# Altium PCB PCB2.PcbDoc
Units mm, origin at the board's own origin, x right, y up, seen from the top; angles counter-clockwise.
Board outline 100 x 55 mm, 2 copper layers (Top Layer, Bottom Layer); 46 components, 49 nets, 174 pads, 71 vias.
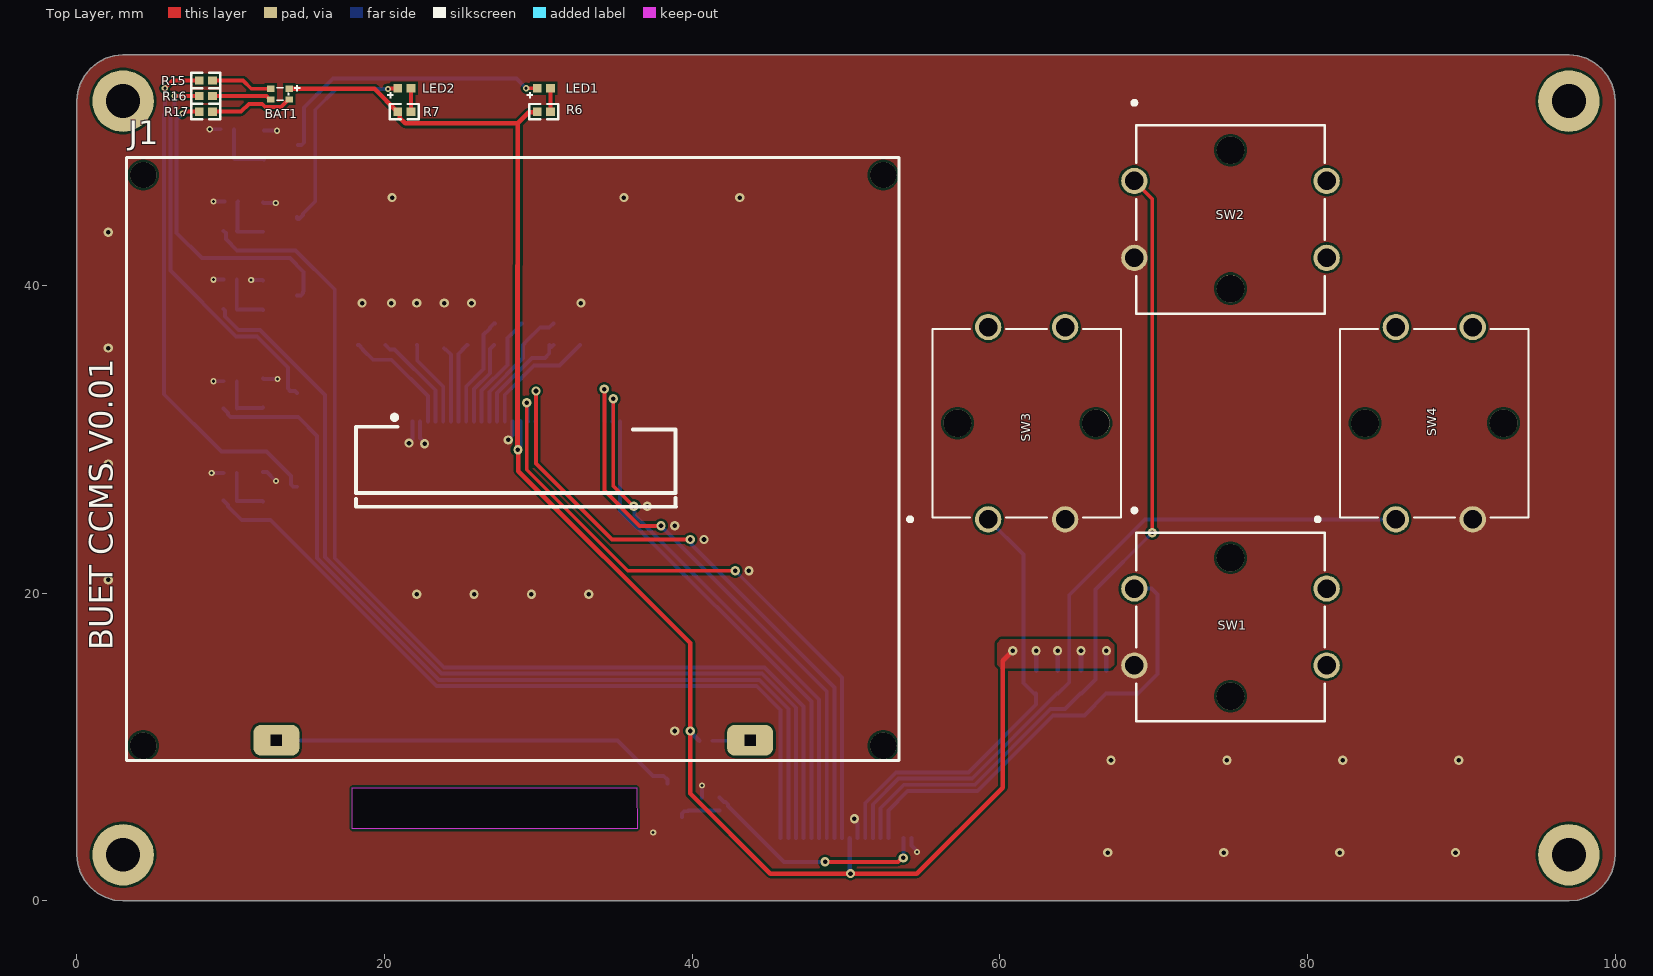
[diagram p0: Top Layer view]
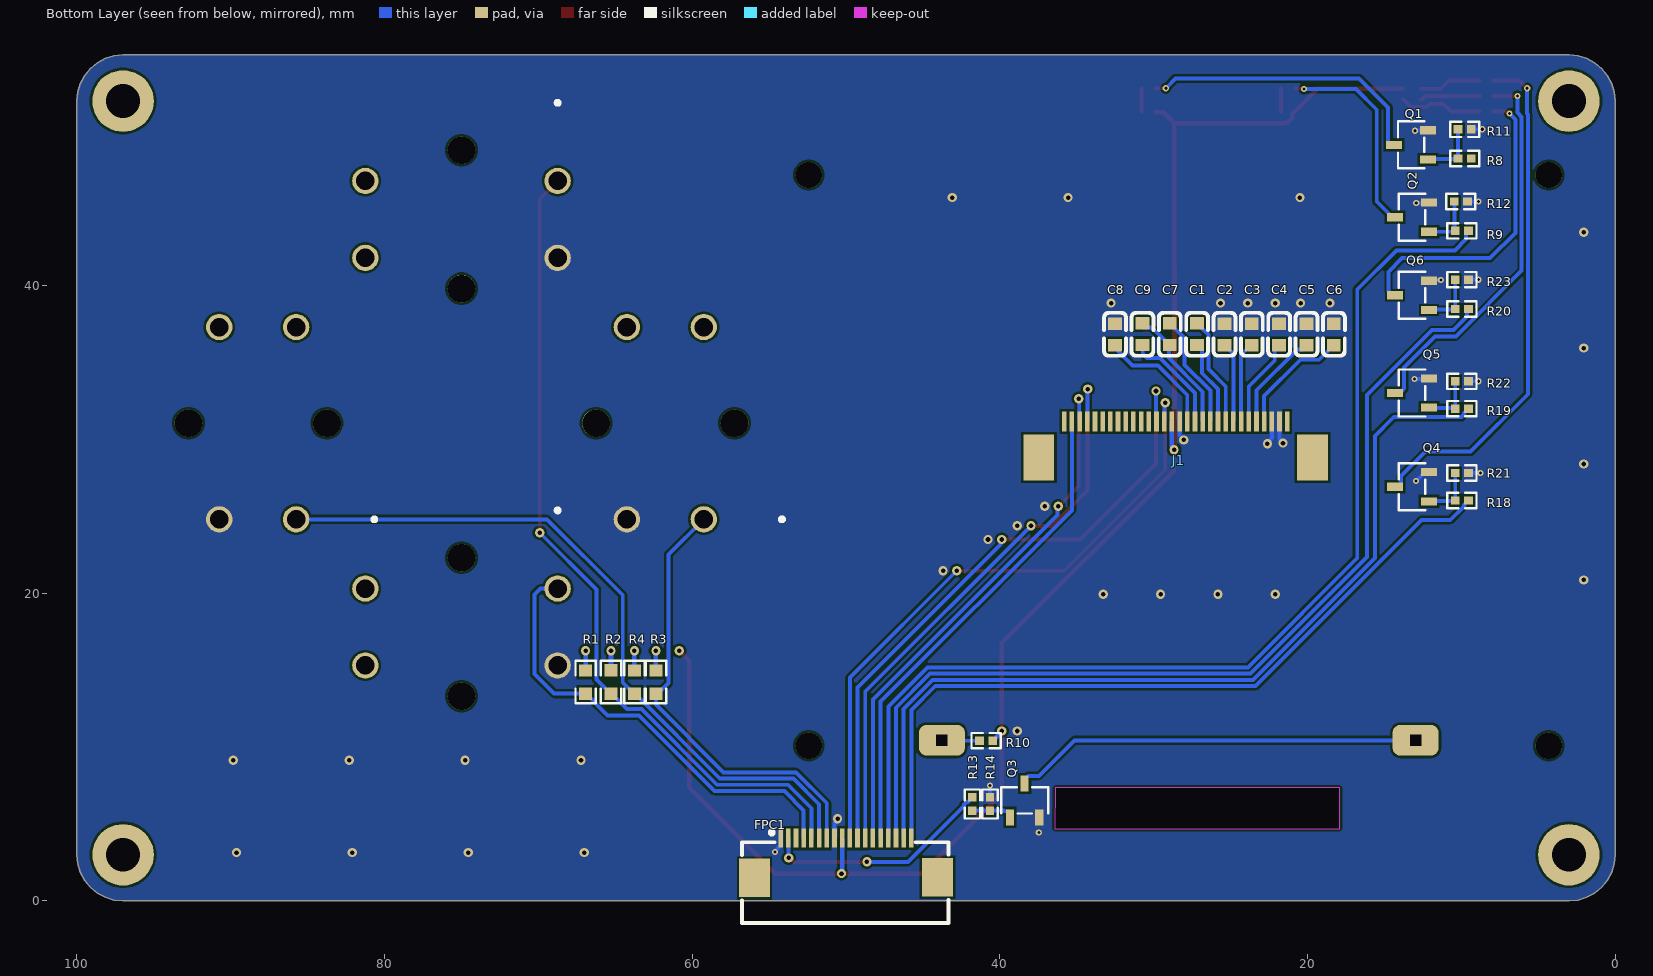
[diagram p1: Bottom Layer view, seen from below]
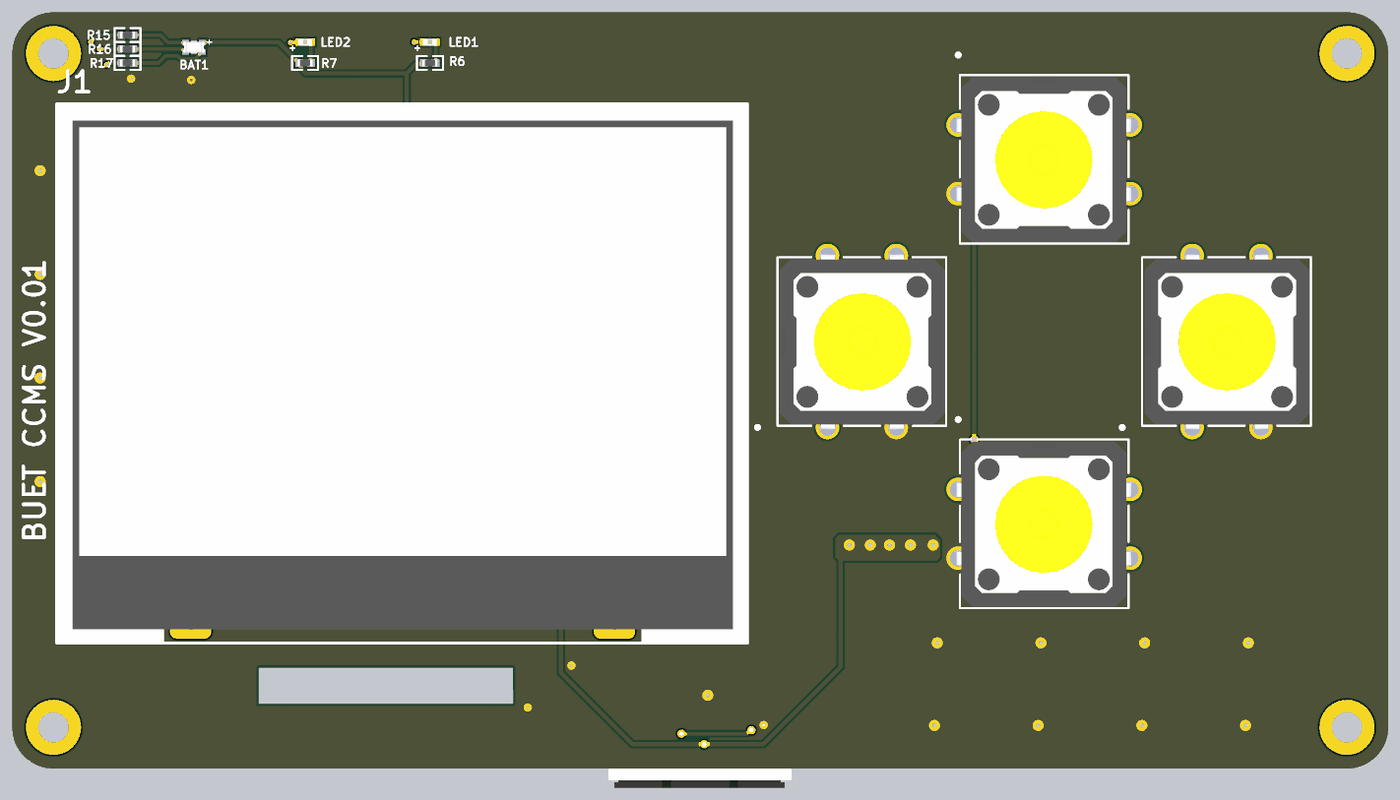
[diagram p2: 3D render of the assembled board from above, using the file's embedded part models]
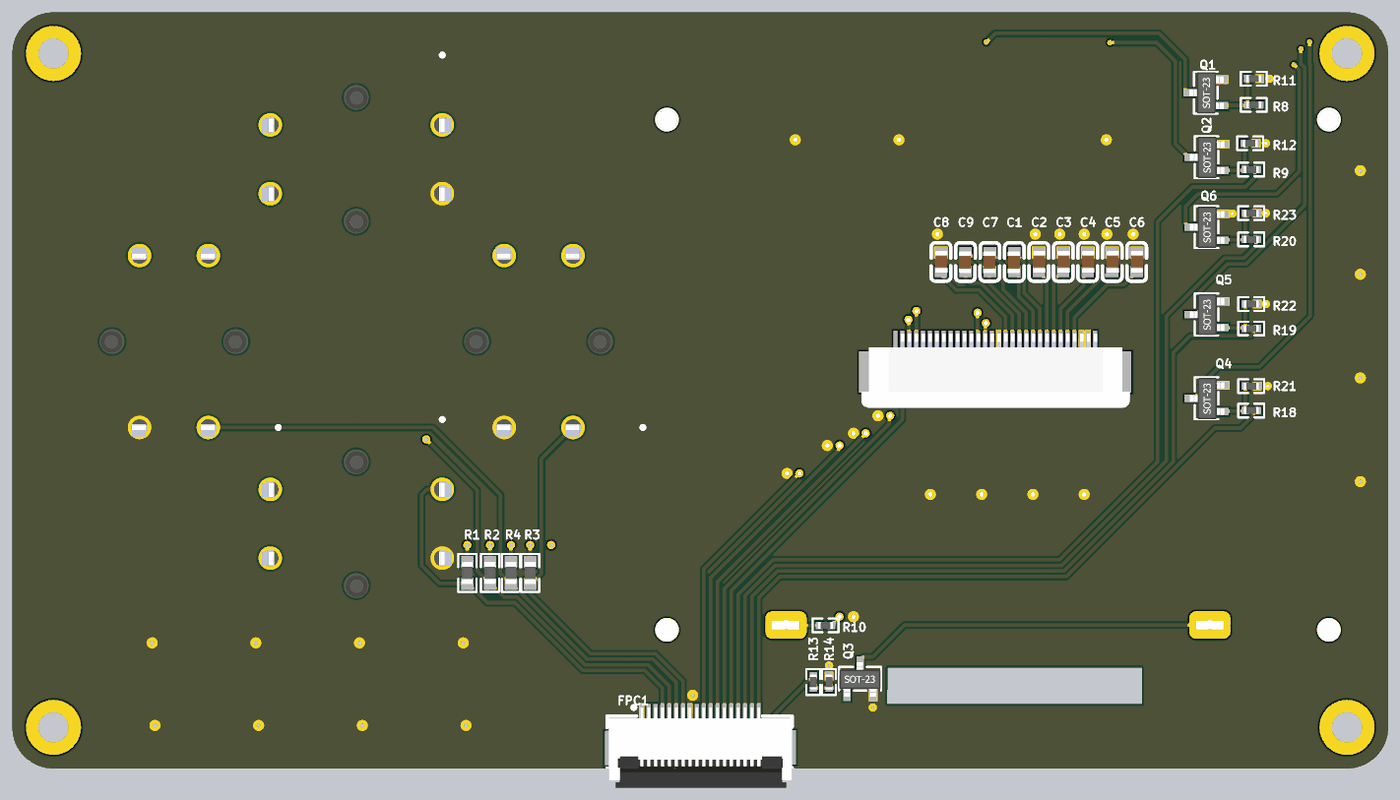
[diagram p3: 3D render of the assembled board from below, using the file's embedded part models]

## Layer stack, top to bottom
Top Solder: solder mask 0.0102, Solder Resist, Dk 3.5
Top Layer: signal copper 0.0356
Dielectric 1: dielectric 0.32, FR-4, Dk 4.8
Bottom Layer: signal copper 0.0356
Bottom Solder: solder mask 0.0102, Solder Resist, Dk 3.5

## Board outline
100,52 99.942,52.585 99.772,53.148 99.494,53.667 99.121,54.121 98.667,54.494 98.148,54.772 97.585,54.942 97,55 3,55 2.415,54.942 1.852,54.772 1.333,54.494 0.879,54.121 0.506,53.667 0.228,53.148 0.058,52.585 0,52 0,3 0.058,2.415 0.228,1.852 0.506,1.333 0.879,0.879 1.333,0.506 1.852,0.228 2.415,0.058 3,0 97,0 97.585,0.058 98.148,0.228 98.667,0.506 99.121,0.879 99.494,1.333 99.772,1.852 99.942,2.415 100,3
cut-out: 36.419,4.699 17.907,4.699 17.907,7.342 36.388,7.342

## Design rules (kind name [scope] priority, off if disabled: settings)
Clearance [All] p1: gap=0.15 ignorepadtopadclearanceinfootprint=TRUE except(0: Arc-Hole Track-Hole SMDPad-Hole THPad-Hole Via-Hole Fill-Hole Poly-Hole Region-Hole Text-Hole)
PolygonConnect [All] p1: connectstyle=Direct reliefconductorwidth=0.254 reliefentries=4 polygonreliefangle="90 Angle" airgapwidth=0.254
RoutingVias [All] p1: holewidth=0.711 width=1.27 viastyle="Through Hole" minholewidth=0.711 minwidth=1.27 maxholewidth=0.711 maxwidth=1.27
SolderMaskExpansion [All] p1: expansion=0.102 istentingtop=FALSE
Width Width_1 [InNet('+3.3V')] p1: maxlimit=0.3 minlimit=0.3 preferedwidth=0.3
Width [All] p2: maxlimit=0.254 minlimit=0.254 preferedwidth=0.254
30 further rules are at their usual default settings.

## Classes and differential pairs
net class 3.3: +3.3V

## Components (designator, comment, footprint, x,y, rotation, side; value= is the part's Value field where it differs from the comment)
BAT1 "XL-1608RGBC" "LED RGB 0603" 13.208,52.451 r180 top
C1 "1uF" C0603 27.173,36.845 r90 bottom value=50V,1uF
C2 "1uF" C0603 25.4,36.83 r270 bottom value=50V,1uF
C3 "1uF" C0603 23.622,36.83 r270 bottom value=50V,1uF
C4 "1uF" C0603 21.844,36.83 r270 bottom value=50V,1uF
C5 "1uF" C0603 20.066,36.83 r270 bottom value=50V,1uF
C6 "1uF" C0603 18.288,36.83 r270 bottom value=50V,1uF
C7 "1uF" C0603 28.951,36.845 r90 bottom value=50V,1uF
C8 "1uF" C0603 32.512,36.83 r270 bottom value=50V,1uF
C9 "1uF" C0603 30.729,36.845 r90 bottom value=50V,1uF
FPC1 "FPC-05F-18PH20" FPC-SMD_18P-P0.50_horizontal 50,2.794 r180 bottom
J1 "COG display" COG 28.368,28.641 r0 top
LED1 "TJ-S1005CL4T5ALC6B-A5" "LED 0402" 30.353,52.832 r0 top value=Blue,20mA
LED2 "TJ-S1005CL4T5ALC6B-A5" "LED 0402" 21.284,52.832 r0 top value=Blue,20mA
Q1 "MMBT2222ALT1G" SOT-23 13.26,49.149 r180 bottom
Q2 "MMBT2222ALT1G" SOT-23 13.208,44.45 r180 bottom
Q3 "MMBT2222ALT1G" SOT-23 38.387,6.538 r270 bottom
Q4 "MMBT2222ALT1G" SOT-23 13.208,26.924 r180 bottom
Q5 "MMBT2222ALT1G" SOT-23 13.208,33.02 r180 bottom
Q6 "MMBT2222ALT1G" SOT-23 13.208,39.37 r180 bottom
R1 "0603WAF100JT5E" R0603 66.929,14.224 r270 bottom value=10kΩ,75V
R2 "0603WAF100JT5E" R0603 65.278,14.233 r270 bottom value=10kΩ,75V
R3 "0603WAF100JT5E" R0603 62.357,14.224 r270 bottom value=10kΩ,75V
R4 "0603WAF100JT5E" R0603 63.754,14.224 r270 bottom value=10kΩ,75V
R6 "1K" R0402 30.353,51.308 r0 top value=1kΩ,50V,5%
R7 "1K" R0402 21.284,51.308 r0 top value=1kΩ,50V,5%
R8 "1K" R0402 9.779,48.26 r0 bottom value=1kΩ,50V,5%
R9 "1K" R0402 9.958,43.561 r0 bottom value=1kΩ,50V,5%
R10 "1K" R0402 40.894,10.414 r0 bottom value=1kΩ,50V,5%
R11 "1kΩ" R0402 9.779,50.165 r0 bottom value=10kΩ,75V
R12 "1kΩ" R0402 10.033,45.466 r0 bottom value=10kΩ,75V
R13 "1K" R0402 41.783,6.298 r270 bottom value=1kΩ,50V,5%
R14 "1kΩ" R0402 40.64,6.298 r270 bottom value=10kΩ,75V
R15 "2.2KΩ" R0402 8.382,53.34 r180 top value=2.2kΩ,50V,1%
R16 "2.2KΩ" R0402 8.382,52.324 r180 top value=2.2kΩ,50V,1%
R17 "2.2KΩ" R0402 8.382,51.308 r180 top value=2.2kΩ,50V,1%
R18 "1K" R0402 9.958,26.035 r0 bottom value=1kΩ,50V,5%
R19 "1K" R0402 9.958,32.004 r0 bottom value=1kΩ,50V,5%
R20 "1K" R0402 9.958,38.481 r0 bottom value=1kΩ,50V,5%
R21 "1kΩ" R0402 9.958,27.813 r0 bottom value=10kΩ,75V
R22 "1kΩ" R0402 9.958,33.782 r0 bottom value=10kΩ,75V
R23 "1kΩ" R0402 9.958,40.386 r0 bottom value=10kΩ,75V
SW1 "B3F-4055" SW_B3F-4050_OMR 74.996,17.806 r0 top locked
SW2 "B3F-4055" SW_B3F-4050_OMR 74.996,44.306 r0 top
SW3 "B3F-4055" SW_B3F-4050_OMR 61.746,31.056 r90 top locked
SW4 "B3F-4055" SW_B3F-4050_OMR 88.246,31.056 r90 top locked

## Footprints (in the part's own frame and the unit in brackets; to place one, negate y for a bottom-side part, rotate by r counter-clockwise, add the part's x,y. Pads: shape width x height; smd on the part's side, far side on the other; paste and mask are expansions set on the pad)
C0603 [mm]
  rect 0.8x0.9 smd paste+0 mask+0.051: 1(-0.7,0) 2(0.7,0)
  silkscreen extent -1.41,-0.71 1.39,0.72, body extent -0.83,-0.42 0.77,0.48, height 0.8
COG [mm]
  rect 2x3 smd far side: 0(-8.703,0.188) 0(9.097,0.188)
  round 1.7 hole 1.7: 1(-24.05,-18.55) 1(-24.05,18.55) 1(24.05,-18.55) 1(24.05,18.55)
  rect 0.3x1.3 smd far side: 1(7.447,2.538) 2(6.947,2.538) 3(6.447,2.538) 4(5.947,2.538) 5(5.447,2.538) 6(4.947,2.538) 7(4.447,2.538) 8(3.947,2.538) 9(3.447,2.538) 10(2.947,2.538) 11(2.447,2.538) 12(1.947,2.538) 13(1.447,2.538) 14(0.947,2.538) 15(0.447,2.538) 16(-0.053,2.538) 17(-0.553,2.538) 18(-1.053,2.538) 19(-1.553,2.538) 20(-2.053,2.538) 21(-2.553,2.538) 22(-3.053,2.538) 23(-3.553,2.538) 24(-4.053,2.538) 25(-4.553,2.538) 26(-5.053,2.538) 27(-5.553,2.538) 28(-6.053,2.538) 29(-6.553,2.538) 30(-7.053,2.538)
  rrect50% 3x2 hole 0.7 square: A(15.4,-18.2) K(-15.4,-18.2)
  silkscreen extent -25.14,-19.51 25.06,19.69, body extent -25.09,-19.62 25.11,19.58, height 4
FPC-SMD_18P-P0.50_horizontal [mm]
  rect 0.3x1.25 smd paste+0 mask+0.05: 1(-4.25,1.288) 2(-3.75,1.288) 3(-3.25,1.288) 4(-2.75,1.288) 5(-2.25,1.288) 6(-1.75,1.288) 7(-1.25,1.288) 8(-0.75,1.288) 9(-0.25,1.288) 10(0.25,1.288) 11(0.75,1.288) 12(1.25,1.288) 13(1.75,1.287) 14(2.25,1.287) 15(2.75,1.287) 16(3.25,1.287) 17(3.75,1.287) 18(4.25,1.287)
  rect 2x2.5 smd paste+0 mask+0.05: 19(-5.94,-1.288) 20(5.94,-1.252)
  silkscreen extent -6.77,-4.22 6.67,1.78, body extent -6.64,-4.19 6.66,1.66, height 2.11
"LED 0402" [mm]
  rect 0.566x0.54 smd paste-100 mask+0.051: 1(-0.433,0) 2(0.433,0)
  silkscreen extent -1.11,-0.65 -0.71,-0.25, body extent -0.5,-0.26 0.5,0.24, height 0.35
"LED RGB 0603" [mm]
  rect 0.5x0.4 smd paste+0 mask+0.051: 1(-0.6,0.35) 2(0.6,0.35) 3(-0.6,-0.35) 4(0.6,-0.35)
  silkscreen extent -1.31,-0.59 0.2,0.4, body extent -0.8,-0.4 0.8,0.4, height 0.55
R0402 [mm]
  rect 0.566x0.54 smd paste-100 mask+0.051: 1(-0.433,0) 2(0.433,0)
  silkscreen extent -0.94,-0.5 0.94,0.5, body extent -0.55,-0.25 0.55,0.25, height 0.32
R0603 [mm]
  rect 0.806x0.864 smd paste-100 mask+0.051: 1(-0.753,0) 2(0.753,0)
  silkscreen extent -1.39,-0.66 1.39,0.66, body extent -0.8,-0.4 0.8,0.4, height 0.45
SOT-23 [mm]
  rect 1.037x0.532 smd paste+0 mask+0.051: 1(1.101,-0.95) 2(1.101,0.95) 3(-1.101,0)
  silkscreen extent -0.86,-1.53 0.86,1.53, body extent -1.2,-1.51 1.3,1.49, height 1.1
SW_B3F-4050_OMR [mm]
  round 1.708 / inner round 1.524 / far side round 1.708 hole 1.2 paste-0.854 mask+0: 1(-6.25,2.5) 2(6.25,2.5) 3(-6.25,-2.5) 4(6.25,-2.5)
  round 1.8 / inner round 1.524 / far side round 1.8 hole 1.8 unplated paste-0.9 mask-0.902: 5(0,4.5) 6(0,-4.5)
  silkscreen extent -6.38,-6.13 6.13,7.71, body extent -6.91,-6.04 6.85,5.96, height 7.5

## Part data
BAT1: "0603 RGB LEDs ROHS", LCSC=C5349936, Manufacturer=XINGLIGHT, Operating Temperature=-30℃~+85℃, Package=0603, Datasheet=https://atta.szlcsc.com/upload/public/pdf/source/20240218/D6E53B1911387F9E4C84048A3296A5A3.pdf, MPN=XL-1608RGBC
C1 C2 C3 C4 C5 C6 C7 C8 C9: library part 0603B105K500NT, "50V 1uF X7R ±10% 0603 Multilayer Ceramic Capacitors MLCC - SMD/SMT ROHS", LCSC=C90540, Manufacturer=FH, Package=0603, Datasheet=https://www.lcsc.com/datasheet/lcsc_datasheet_2304140030_FH--Guangdong-Fenghua-Advanced-Tech-0603B105K500NT_C90540.pdf, MPN=0603B105K500NT
FPC1: "Flip type -25℃~+85℃ 18P Bottom Contact Horizontal attachment 0.5mm SMD,P=0.5mm,Surface Mount，Right Angle FFC, FPC", LCSC=C2856802, Manufacturer=XUNPU, Operating Temperature Range=-25℃~+85℃, Package=SMD,P=0.5mm,卧贴, Datasheet=https://atta.szlcsc.com/upload/public/pdf/source/20210922/C2856802_2A845D1961F33AEC1ED22CECB292335F.pdf, MPN=FPC-05F-18PH20
J1: "FPC CONNECTOR", LCSC=C481233, Manufacturer=XFCN, Datasheet=https://datasheet.lcsc.com/lcsc/2304140030_XFCN-F0501-B-30-20T-R_C481233.pdf
LED1 LED2: "20mA Colorless transparent lens -40℃~+80℃ 465nm~470nm Blue 120° 111mW 0402 LED Indication - Discrete ROHS", LCSC=C917189, Manufacturer=TOGIALED, Package=0402, Datasheet=https://www.lcsc.com/datasheet/lcsc_datasheet_2011180235_TOGIALED-TJ-S1005CL4T5ALC6B-A5_C917189.pdf, MPN=TJ-S1005CL4T5ALC6B-A5
Q1 Q2 Q3 Q4 Q5 Q6: "Bipolar (BJT) Transistor NPN 40 V 600 mA 300MHz 225 mW Surface Mount SOT-23-3 (TO-236)", Manufacturer="ON Semiconductor", Max Operating Temp=+150°C, Min Operating Temp=-55°C, Package=SOT-23, MPN=MMBT2222ALT1G
R1 R2 R3 R4: "100mW Thick Film Resistors ±1% ±400ppm/℃ 10Ω 0603 Chip Resistor - Surface Mount ROHS", LCSC=C25804, Manufacturer="UNI-ROYAL(Uniroyal Elec)", MPN=0603WAF1002T5E, Package=0603, Datasheet=https://datasheet.lcsc.com/szlcsc/Uniroyal-Elec-0603WAF1002T5E_C25804.pdf
R6 R7 R8 R9 R10 R13 R18 R19 R20: library part SR0402JR-7W1KL, "125mW Thick Film Resistors 50V ±200ppm/℃ ±5% 1kΩ 0402 Chip Resistor - Surface Mount ROHS", LCSC=C2085102, Manufacturer=YAGEO, Max Operating Temp=+155, Min Operating Temp=-55, Package=0402, Datasheet=https://datasheet.lcsc.com/lcsc/2304140030_YAGEO-RC0402FR-072K7L_C138017.pdf, MPN=SR0402JR-7W1KL
R11 R12 R14 R21 R22 R23: library part 0402WGF1001TCE, "62.5mW Thick Film Resistors ±100ppm/℃ ±1% 1kΩ 0402 Chip Resistor - Surface Mount ROHS", LCSC=C25804, Manufacturer="UNI-ROYAL(Uniroyal Elec)", MPN=0603WAF1002T5E, Package=0402, Datasheet=https://datasheet.lcsc.com/szlcsc/Uniroyal-Elec-0603WAF1002T5E_C25804.pdf
R15 R16 R17: library part RC0402FR-072K2L, "62.5mW Thick Film Resistors 50V ±100ppm/℃ ±1% 2.2kΩ 0402 Chip Resistor - Surface Mount ROHS", LCSC=C114762, Manufacturer=YAGEO, Max Operating Temp=+155, Min Operating Temp=-55, Package=0402, Datasheet=https://datasheet.lcsc.com/lcsc/2304140030_YAGEO-RC0402FR-072K2L_C114762.pdf, MPN=RC0402FR-072K2L
SW1 SW2 SW3 SW4: "Tactile Switch SPST-NO Top Actuated Through Hole", Mfr_Name=Omron, RefDes=RefDes, Type=Type

## Free pads (board coordinates)
  round 4 hole 2.2: 1(3,3) 1(3,52) 1(97,3) 1(97,52)

## Via types
v1: diameter 0.6, hole 0.3, Top Layer to Bottom Layer, 53 vias
v2: diameter 0.4, hole 0.2, Top Layer to Bottom Layer, 18 vias

## Nets (pads, with @x,y where several pads share a name; then routed paths per layer and width w, separated by ;. In a path a pad name is that pad's centre, name@x,y a point inside that pad or via, vN(x,y) a via of type N, cw(c..) or ccw(c..) an arc to the next point about the centre after c; other vN are vias at no path point)
+3.3V: BAT1.3 FPC1.9 J1.15 R1.1 R2.1 R3.1 R4.1 R6.1 R7.1 R10.1 | length 109.9
  Top Layer w0.3: BAT1.3 19.346,52.801 20.839,51.308 20.864,51.308 20.984,51.188 20.984,50.898 21.336,50.546 28.668,50.546 ; v1(28.668,29.337) 28.645,29.36 28.645,41.33 28.668,41.353 28.668,50.546 ; v1@28.702,29.337 28.702,27.94 39.878,16.764 v1(39.878,11.049) 39.878,6.985 45.085,1.778 v1(50.292,1.778) 54.61,1.778 60.198,7.366 60.198,15.621 v1(60.833,16.256) ; R6.1@29.907,51.308 29.858,51.258 29.38,51.258 28.668,50.546
  Bottom Layer w0.3: v1(28.668,29.337) 28.668,29.384 28.815,29.531 J1.15 ; v1(39.878,11.049) 39.878,10.984 40.448,10.414 R10.1 ; FPC1.9 50.25,1.82 v1(50.292,1.778) ; R3.1 v1(62.357,16.256) ; R4.1 v1(63.754,16.256) ; R2.1 v1(65.278,16.256) ; R1.1 v1(66.929,16.256)
Button_1: FPC1.4 R1.2 SW1.1 | length 29.8
  Bottom Layer w0.254: FPC1.4 52.75,5.887 54.01,7.147 58.544,7.147 63.462,12.065 65.494,12.065 66.9,13.471 R1.2 68.97,13.471 70.253,14.754 70.253,19.917 69.864,20.306 SW1.1
Button_2: FPC1.5 R2.2 SW2.1 | length 53.8
  Top Layer w0.254: SW2.1 69.908,45.644 v1(69.908,23.934)
  Bottom Layer w0.254: FPC1.5 52.25,6.022 53.779,7.551 58.377,7.551 63.295,12.469 64.239,12.469 65.249,13.48 R2.2 65.307,13.48 66.22,14.393 66.22,20.246 v1(69.908,23.934)
Button_3: FPC1.6 R4.2 SW4.1 | length 47.2
  Bottom Layer w0.254: FPC1.6 51.75,6.284 53.421,7.955 58.209,7.955 63.725,13.471 63.783,13.471 64.516,14.204 64.516,19.875 69.447,24.806 SW4.1@85.764,24.806
Button_4: FPC1.7 R3.2 SW3.1 | length 29.4
  Bottom Layer w0.254: FPC1.7 51.25,6.356 53.253,8.359 57.952,8.359 62.357,12.764 R3.2 ; SW3.1 61.542,22.51 61.542,14.468 61.541,14.467 61.541,14.16 R3.2@62.279,13.422
CS: FPC1.14 J1.2 | length 32.2
  Bottom Layer w0.254: J1.2 35.315,25.391 47.75,12.956 FPC1.14
DISP_RESET: FPC1.13 J1.3 | length 35.6
  Top Layer w0.254: v1(34.869,32.639) 34.869,26.98 v1(36.195,25.654)
  Bottom Layer w0.254: J1.3 34.838,31.202 34.838,32.608 v1(34.869,32.639) ; v1(36.195,25.654) 36.261,25.588 36.261,25.08 48.25,13.091 FPC1.13
GND: C2.1 C3.1 C4.1 C5.1 C6.1 C8.1 FPC1.1 FPC1.8 J1.16 J1.28 J1.29 Q1.2 Q2.2 Q3.2 Q4.2 Q5.2 Q6.2 R11.1 R12.1 R14.1 R21.1 R22.1 R23.1 SW1.3 SW2.3 SW3.3 SW4.3 | length 15.5
  Bottom Layer w0.254: v2(8.636,50.165) R11.1 ; v2(8.763,27.813) R21.1 ; v2(8.89,33.782) R22.1 ; v2(8.89,40.386) R23.1 ; v2(8.89,45.466) R12.1 ; v2(11.331,40.358) 12.069,40.358 Q6.2 ; Q4.2 12.36,27.874 12.929,27.305 v2(12.954,27.305) ; Q5.2 12.14,33.937 v2(13.053,33.937) ; Q2.2 12.14,45.367 v2(12.926,45.367) ; Q1.2 12.174,50.084 12.996,50.084 v2(13.011,50.069) ; v1(21.59,29.765) 21.59,29.812 21.815,30.037 J1.29 ; J1.28 22.315,30.103 22.606,29.812 v1(22.606,29.718) ; v1(28.045,29.972) 28.045,30.009 28.311,30.275 28.311,31.175 J1.16 ; R14.1 v2(40.64,7.493) ; v1(50.546,5.334) 50.546,5.24 50.75,5.036 FPC1.8 ; FPC1.1 54.25,3.607 54.582,3.274 54.582,3.203 v2(54.61,3.175)
  other v1: 67.021,3.14 74.557,3.14 82.092,3.14 89.627,3.14 67.225,9.144 74.761,9.144 82.296,9.144 89.831,9.144 38.862,11.049 22.098,19.939 25.823,19.939 29.549,19.939 33.274,19.939 2.032,20.87 43.688,21.463 40.767,23.495 38.862,24.384 37.084,25.654 2.032,28.406 2.032,35.941 18.542,38.862 20.447,38.862 22.098,38.862 23.876,38.862 25.654,38.862 32.766,38.862 2.032,43.476 20.489,45.72 35.56,45.72 43.095,45.72
  other v2: 37.465,4.445
LCD_BK_LIGHT: FPC1.2 R13.1 | length 15.1
  Top Layer w0.254: v1(48.641,2.54) 53.373,2.54 53.627,2.794 v1(53.721,2.794)
  Bottom Layer w0.254: R13.1 41.783,6.718 42.076,6.425 42.168,6.425 42.33,6.263 42.33,6.171 45.961,2.54 v1(48.641,2.54) ; v1(53.721,2.794) 53.736,2.809 53.736,4.067 FPC1.2
LED1: R8.1
MOSI: FPC1.10 J1.14 | length 42.1
  Top Layer w0.254: v1(29.245,32.385) 29.245,28.032 35.814,21.463 v1(42.799,21.463)
  Bottom Layer w0.254: v1(29.245,32.385) 29.292,32.338 29.292,31.202 J1.14 ; v1(42.799,21.463) 49.75,14.512 FPC1.10
NET_LED: FPC1.15 R9.1 | length 69.5
  Bottom Layer w0.254: R9.1 9.538,43.561 9.681,43.418 9.681,43.024 10.414,42.291 14.224,42.291 16.764,39.751 16.764,22.289 23.871,15.182 44.698,15.182 47.25,12.63 FPC1.15
NetBAT1_1: BAT1.1 R17.1 | length 5.5
  Top Layer w0.254: R17.1 10.668,51.308 11.176,51.816 12.051,51.816 12.243,51.624 13.281,51.624 13.758,52.101 BAT1.1
NetBAT1_2: BAT1.2 R16.1 | length 3.9
  Top Layer w0.254: R16.1 12.335,52.324 12.558,52.101 BAT1.2
NetBAT1_4: BAT1.4 R15.1 | length 4
  Top Layer w0.254: R15.1 10.795,53.34 11.334,52.801 BAT1.4
NetC1_1: C1.1 J1.21 | length 5.5
  Bottom Layer w0.254: J1.21 25.815,33.27 26.85,34.305 26.85,35.873 C1.1@27.123,36.146
NetC1_2: C1.2 J1.22 | length 7.2
  Bottom Layer w0.254: J1.22 25.315,33.443 26.446,34.574 26.446,36.818 26.85,37.222 26.85,37.272 27.123,37.545 C1.2
NetC2_2: C2.2 J1.23 | length 5.2
  Bottom Layer w0.254: J1.23 24.815,35.545 25.077,35.807 25.077,35.857 25.35,36.13 C2.2
NetC3_2: C3.2 J1.24 | length 5
  Bottom Layer w0.254: C3.2@23.876,35.926 23.945,35.857 23.981,35.857 24.315,35.524 J1.24
NetC4_2: C4.2 J1.25 | length 5.7
  Bottom Layer w0.254: C4.2@22.098,36.13 22.126,36.102 22.126,35.132 23.815,33.444 J1.25
NetC5_2: C5.2 J1.26 | length 6.5
  Bottom Layer w0.254: C5.2 20.339,35.857 20.658,35.857 23.315,33.2 J1.26
NetC6_2: C6.2 J1.27 | length 7.6
  Bottom Layer w0.254: C6.2 18.338,36.13 18.611,35.857 18.611,35.807 19.239,35.179 20.447,35.179 22.815,32.811 J1.27
NetC7_1: C7.1 C9.2 J1.19 | length 8.4
  Bottom Layer w0.254: J1.19 26.815,33.101 28.998,35.284 C7.1@28.998,36.146 ; C7.1@29.001,36.146 29.274,36.419 29.274,36.421 30.125,37.272 30.71,37.272 C9.2@30.983,37.545
NetC7_2: C7.2 J1.20 | length 7.5
  Bottom Layer w0.254: J1.20 26.315,33.173 27.991,34.849 27.991,36.586 28.628,37.222 28.628,37.272 28.901,37.545 C7.2
NetC8_2: C8.2 J1.17 | length 8
  Bottom Layer w0.254: J1.17 27.815,32.895 29.718,34.798 31.384,34.798 C8.2@32.716,36.13
NetC9_1: C9.1 J1.18 | length 7
  Bottom Layer w0.254: J1.18 27.315,33.03 29.591,35.306 30.425,35.306 30.71,35.59 30.71,36.127 C9.1 ; C9.1@30.856,36.019 C9.1@30.983,36.146
NetJ1_A: J1.A R10.2 | length 2.5
  Bottom Layer w0.254: R10.2 43.74,10.414 J1.A
NetJ1_K: J1.K Q3.3 | length 26.7
  Bottom Layer w0.254: J1.K 35.152,10.441 37.465,8.128 38.151,8.128 38.387,7.892 Q3.3
NetLED1_1: LED1.1 Q1.3 | length 19
  Top Layer w0.254: v2(29.21,52.832) LED1.1
  Bottom Layer w0.254: Q1.3 14.614,49.149 14.753,49.288 14.753,51.583 16.637,53.467 28.575,53.467 v2(29.21,52.832)
NetLED1_2: LED1.2 R6.2 | length 1.5
  Top Layer w0.254: R6.2 LED1.2
NetLED2_1: LED2.1 Q2.3 | length 13.6
  Top Layer w0.254: v2(20.222,52.786) 20.245,52.809 20.747,52.809 LED2.1@20.751,52.806
  Bottom Layer w0.254: Q2.3 14.309,44.365 14.351,44.323 14.435,44.323 14.701,44.589 14.701,44.673 15.494,45.466 15.494,51.435 16.838,52.779 20.216,52.779 v2(20.222,52.786)
NetLED2_2: LED2.2 R7.2 | length 1.5
  Top Layer w0.254: R7.2 LED2.2
NetQ1_1: Q1.1 R8.2 R11.2 | length 3.9
  Bottom Layer w0.254: R11.2 R8.2 10.242,48.229 12.129,48.229 Q1.1
NetQ2_1: Q2.1 R9.2 R12.2 | length 3.6
  Bottom Layer w0.254: R9.2 10.452,43.5 Q2.1 ; R9.2@10.428,43.599 10.428,45.428 R12.2
NetQ3_1: Q3.1 R13.2 R14.2 | length 2.8
  Bottom Layer w0.254: Q3.1 39.337,5.69 39.476,5.829 39.729,5.829 39.766,5.865 R14.2 R13.2
NetQ4_1: Q4.1 R18.2 R21.2 | length 3.5
  Bottom Layer w0.254: R21.2 R18.2 10.421,26.004 12.076,26.004 Q4.1
NetQ4_3: Q4.3 R15.2 | length 33.8
  Top Layer w0.254: v2(5.715,52.832) 6.223,53.34 R15.2
  Bottom Layer w0.254: v2(5.715,52.832) 5.715,51.181 5.669,51.135 5.669,32.939 9.398,29.21 12.319,29.21 13.917,27.612 13.917,27.063 14.056,26.924 Q4.3
NetQ5_1: Q5.1 R19.2 R22.2 | length 3.5
  Bottom Layer w0.254: R22.2 R19.2 10.424,32.037 12.074,32.037 Q5.1
NetQ5_3: Q5.3 R16.2 | length 25.4
  Top Layer w0.254: v2(6.35,52.324) R16.2
  Bottom Layer w0.254: v2(6.35,52.324) 6.35,51.244 6.073,50.967 6.073,40.981 10.351,36.703 11.699,36.703 13.716,34.686 13.716,33.308 13.865,33.159 14.17,33.159 Q5.3
NetQ6_1: Q6.1 R20.2 R23.2 | length 3.6
  Bottom Layer w0.254: R23.2 R20.2 10.421,38.45 12.076,38.45 Q6.1
NetQ6_3: Q6.3 R17.2 | length 20.2
  Top Layer w0.254: v2(6.858,51.181) 6.898,51.181 7.025,51.308 R17.2
  Bottom Layer w0.254: v2(6.858,51.181) 6.477,50.8 6.477,43.434 8.128,41.783 13.843,41.783 14.732,40.894 14.732,39.658 14.701,39.627 14.701,39.509 14.562,39.37 Q6.3
R/W: J1.5
RD: J1.6
RGB_B: FPC1.18 R18.1 | length 50.3
  Bottom Layer w0.254: R18.1 9.538,26.035 9.831,25.742 9.831,25.65 10.716,24.765 12.574,24.765 23.369,13.97 44.196,13.97 45.75,12.416 FPC1.18
RGB_G: FPC1.17 R19.1 | length 57.9
  Bottom Layer w0.254: R19.1 9.538,32.004 9.831,31.711 9.831,31.619 9.993,31.457 14.39,31.457 15.621,30.226 15.621,22.289 23.536,14.374 44.363,14.374 46.25,12.487 FPC1.17
RGB_R: FPC1.16 R20.1 | length 62.8
  Bottom Layer w0.254: R20.1 9.626,38.38 9.626,37.999 9.831,37.794 10.518,37.107 11.915,37.107 16.129,32.893 16.129,22.352 23.703,14.778 44.531,14.778 46.75,12.559 FPC1.16
RS: FPC1.12 J1.4 | length 38.1
  Top Layer w0.254: v1(34.29,33.274) 34.29,26.67 36.576,24.384 v1(37.973,24.384)
  Bottom Layer w0.254: v1(34.29,33.274) 34.292,33.272 34.292,31.202 J1.4 ; v1(37.973,24.384) 48.75,13.607 FPC1.12
SCLK: FPC1.11 J1.13 | length 42.1
  Top Layer w0.254: v1(29.845,33.147) 29.845,28.448 34.798,23.495 v1(39.878,23.495)
  Bottom Layer w0.254: J1.13 29.838,31.202 29.838,31.822 29.845,31.829 v1(29.845,33.147) ; v1(39.878,23.495) 39.944,23.429 39.944,23.175 49.25,13.869 FPC1.11
Warning_LED: FPC1.3
pads on no net: FPC1.19 FPC1.20 J1.0 J1.1 J1.7 J1.8 J1.9 J1.10 J1.11 J1.12 J1.30 SW1.2 SW1.4 SW1.5 SW1.6 SW2.2 SW2.4 SW2.5 SW2.6 SW3.2 SW3.4 SW3.5 SW3.6 SW4.2 SW4.4 SW4.5 SW4.6

## Polygon pours and split planes (outlines as drawn)
GND on Top Layer "GND_L01_P004" (solid, pour order 4): 100,52 99.942,52.585 99.772,53.148 99.494,53.667 99.121,54.121 98.667,54.494 98.148,54.772 97.585,54.942 97,55 3,55 2.415,54.942 1.852,54.772 1.333,54.494 0.879,54.121 0.506,53.667 0.228,53.148 0.058,52.585 0,52 0,3 0.058,2.415 0.228,1.852 0.506,1.333 0.879,0.879 1.333,0.506 1.852,0.228 2.415,0.058 3,0 97,0 97.585,0.058 98.148,0.228 98.667,0.506 99.121,0.879 99.494,1.333 99.772,1.852 99.942,2.415 100,3
+3.3V on Top Layer "+3.3V_L01_P000" (solid, pour order 0): 67.056,17.018 67.437,16.637 67.437,15.367 67.183,15.113 60.071,15.113 59.817,15.367 59.817,16.764 60.071,17.018
GND on Bottom Layer "GND_L02_P005" (solid, pour order 5): 100,52 99.942,52.585 99.772,53.148 99.494,53.667 99.121,54.121 98.667,54.494 98.148,54.772 97.585,54.942 97,55 3,55 2.415,54.942 1.852,54.772 1.333,54.494 0.879,54.121 0.506,53.667 0.228,53.148 0.058,52.585 0,52 0,3 0.058,2.415 0.228,1.852 0.506,1.333 0.879,0.879 1.333,0.506 1.852,0.228 2.415,0.058 3,0 97,0 97.585,0.058 98.148,0.228 98.667,0.506 99.121,0.879 99.494,1.333 99.772,1.852 99.942,2.415 100,3

## Silkscreen, mask and mechanical layers (free items; w line width, h text height)
Top Overlay:
  text "BUET CCMS V0.01" at 2.334,16.294 h1.52 r90